# Altium PCB raman_bahremand.PcbDoc
Units mm, origin at the board's own origin, x right, y up, seen from the top; angles counter-clockwise.
Board outline 104.14 x 65.91 mm, 2 copper layers (Top Layer, Bottom Layer); 28 components, 23 nets, 114 pads, 6 vias.
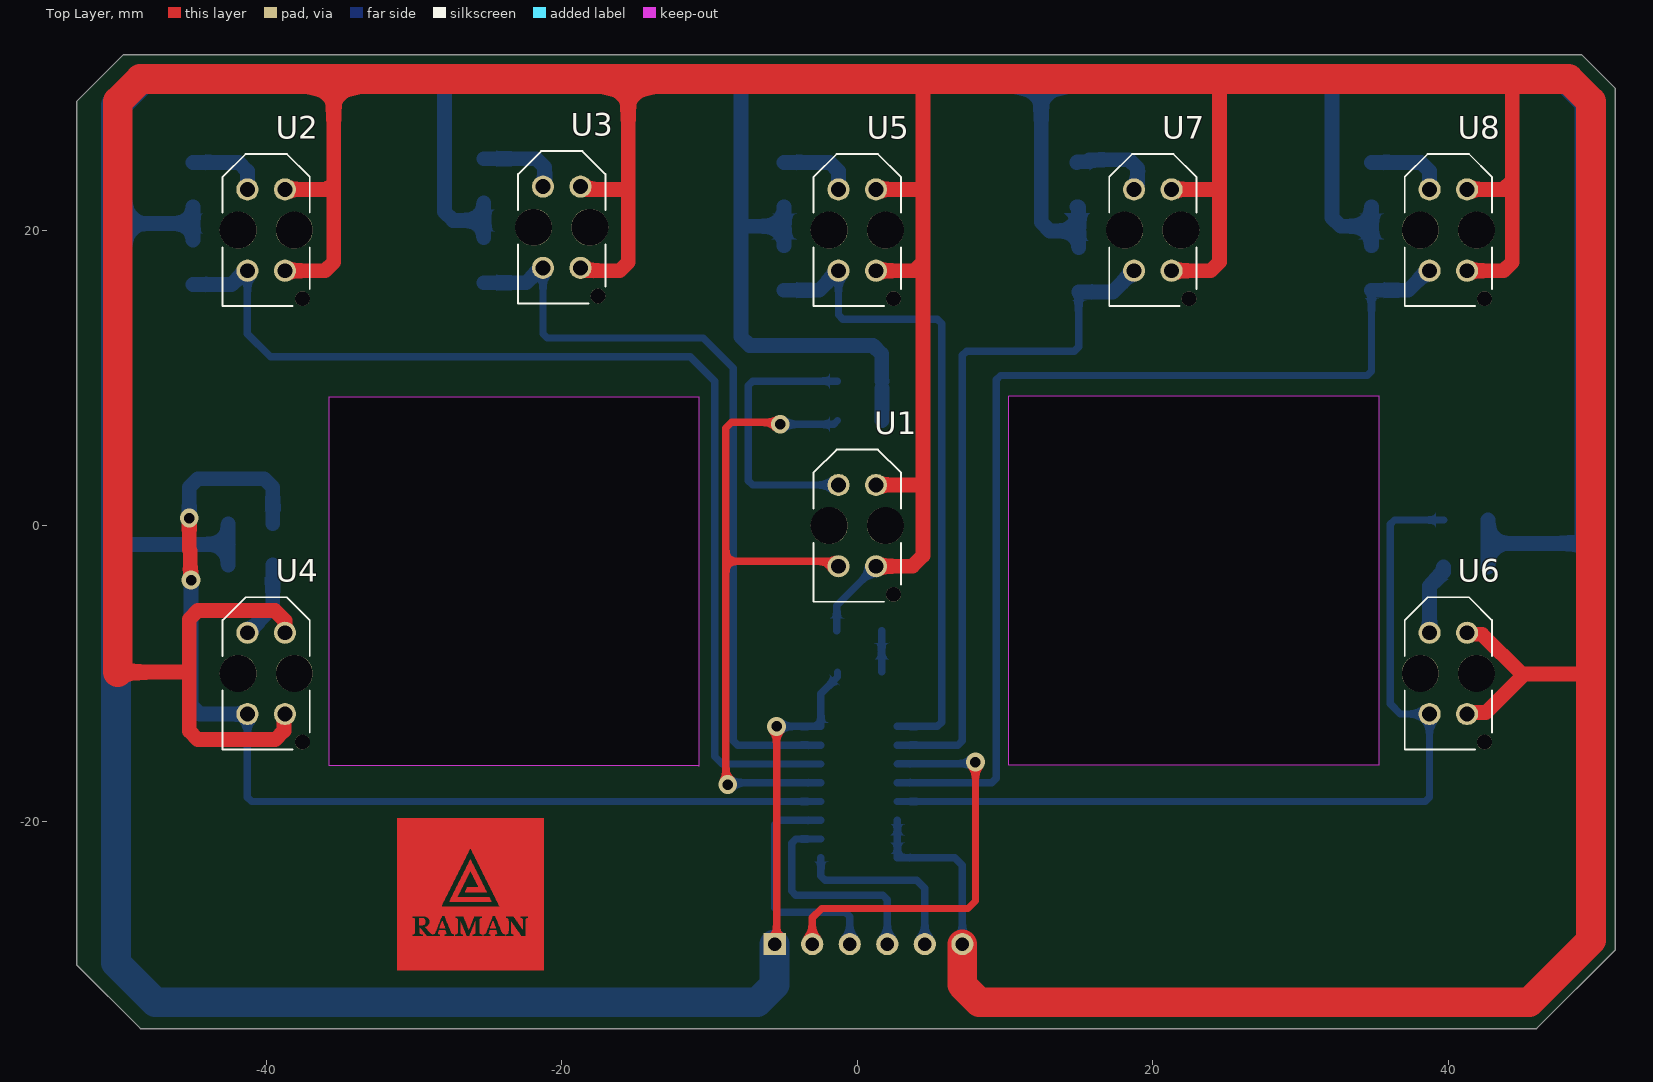
[diagram p0: Top Layer view]
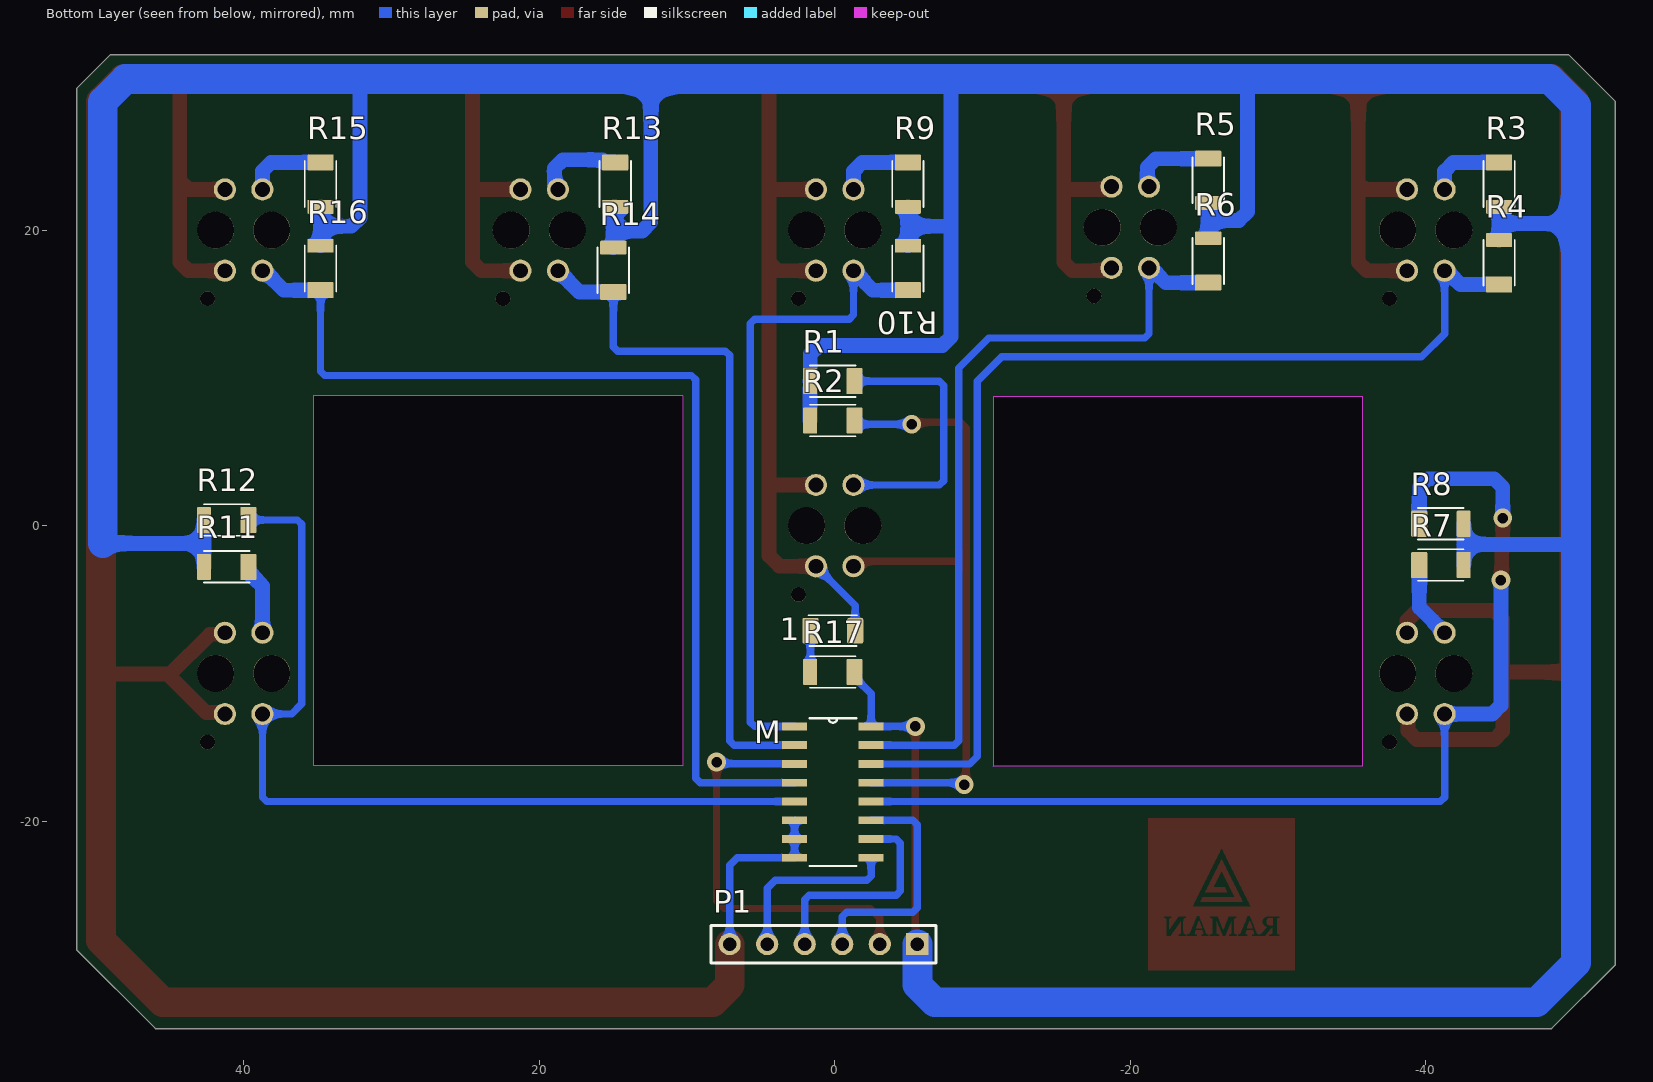
[diagram p1: Bottom Layer view, seen from below]
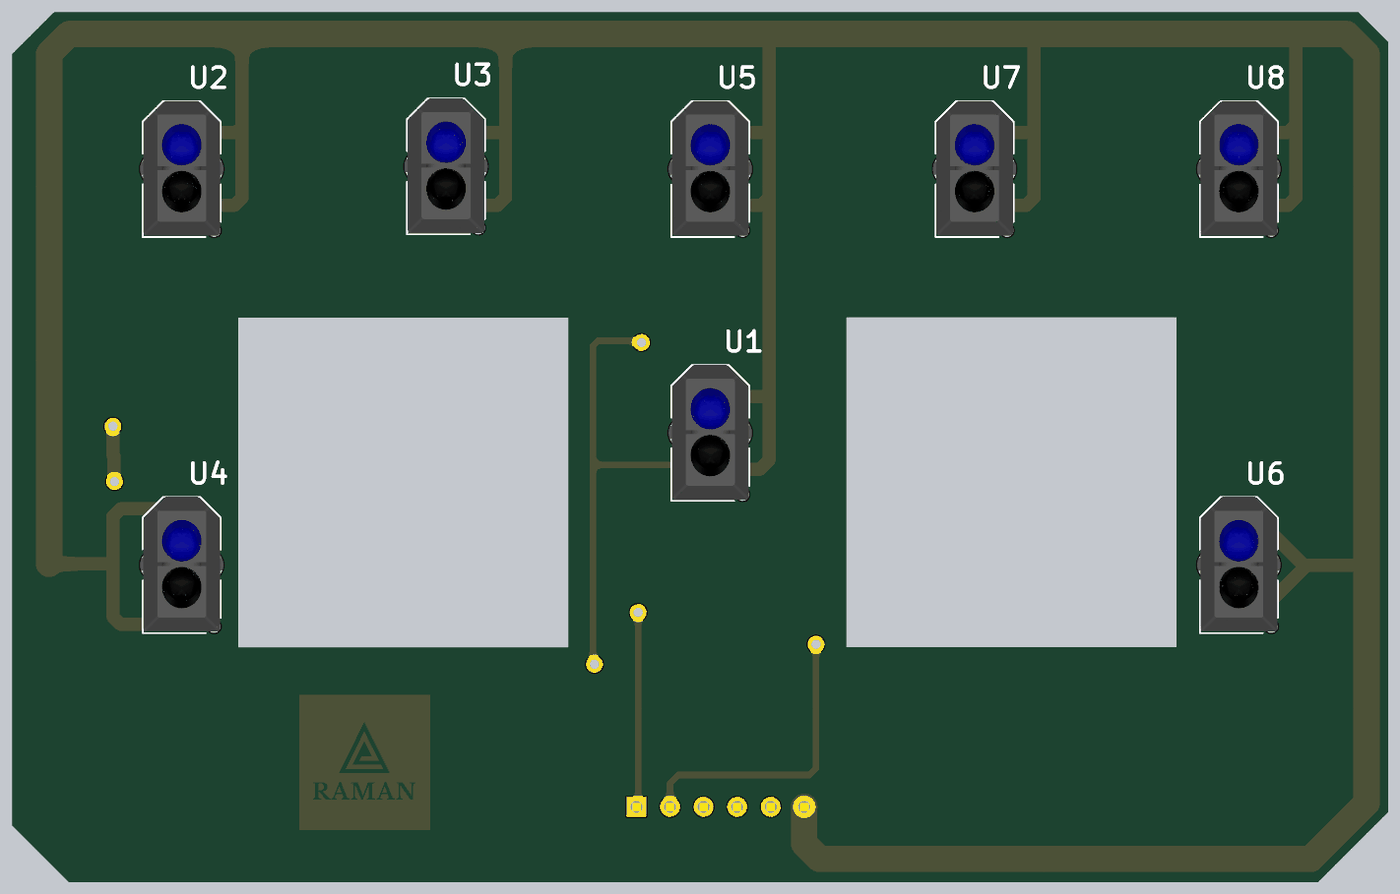
[diagram p2: 3D render of the assembled board from above, using the file's embedded part models]
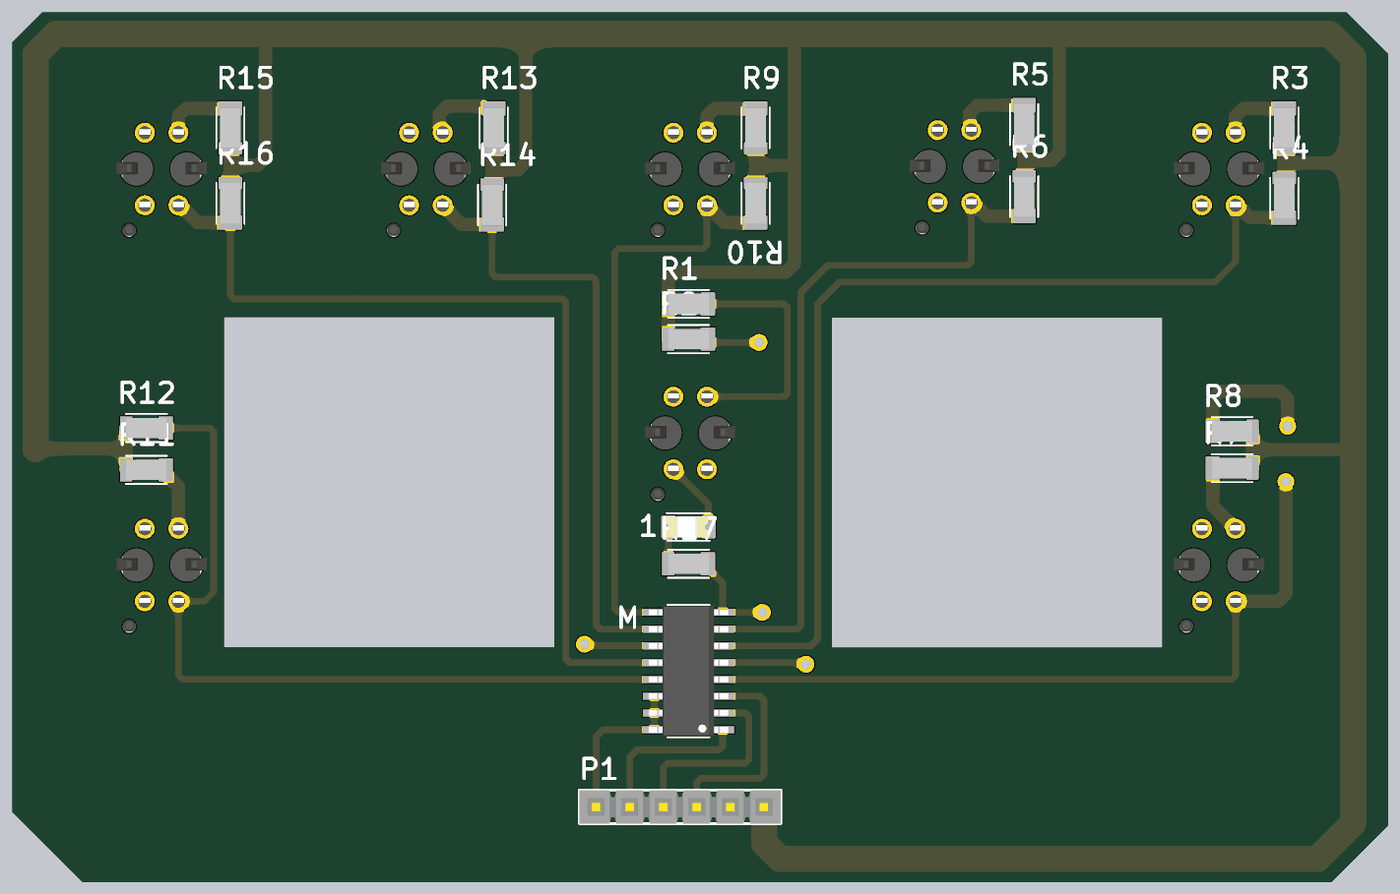
[diagram p3: 3D render of the assembled board from below, using the file's embedded part models]

## Layer stack, top to bottom
Top Solder: solder mask 0.0102, Solder Resist, Dk 3.5
Top Layer: signal copper 0.0356
Dielectric 1: dielectric 0.32, FR-4, Dk 4.8
Bottom Layer: signal copper 0.0356
Bottom Solder: solder mask 0.0102, Solder Resist, Dk 3.5

## Board outline
-52.832,-29.718 -52.832,28.702 -49.657,31.877 49.022,31.877 51.308,29.591 51.308,-28.702 45.974,-34.036 -48.514,-34.036
cut-out: 10.277,8.778 35.277,8.778 35.277,-16.222 35.268,-16.213 10.268,-16.213 10.268,8.768
cut-out: -35.732,8.725 -10.731,8.725 -10.731,-16.275 -10.75,-16.256 -35.732,-16.256

## Design rules (kind name [scope] priority, off if disabled: settings)
Clearance [All] p1: gap=0.254 ignorepadtopadclearanceinfootprint=FALSE except(0: Arc-Hole Track-Hole SMDPad-Hole THPad-Hole Via-Hole Fill-Hole Poly-Hole Region-Hole Text-Hole)
PolygonConnect [All] p1: connectstyle=Relief reliefconductorwidth=0.254 reliefentries=4 polygonreliefangle="90 Angle" airgapwidth=0.254
RoutingVias [All] p1: holewidth=0.711 width=1.27 viastyle="Through Hole" minholewidth=0.711 minwidth=1.27 maxholewidth=0.711 maxwidth=1.27
SolderMaskExpansion [All] p1: expansion=0.102 istentingtop=FALSE
Width [All] p1: maxlimit=2 minlimit=0.5 preferedwidth=1
30 further rules are at their usual default settings.

## Classes and differential pairs
component class Sheet1: 1 M P1 R1 R2 R3 R5 R6 R7 R8 R9 R10 R11 R12 R13 R14 R15 R16 R17 U1 U2 U3 U4 U5 U6 U7

## Components (designator, comment, footprint, x,y, rotation, side; value= is the part's Value field where it differs from the comment)
1 "LTST-C230KFKT" LEDC3216X110 0.127,-7.112 r0 bottom
M "74HC4051D" SOIC127P600X175-16N 0.127,-18.034 r180 bottom
P1 "Header 6" HDR1X6 -5.588,-28.321 r0 bottom
R1 "220" RESC3115X65N 0.127,9.779 r0 bottom
R2 "2K" RESC3115X65N 0.127,7.112 r0 bottom
R3 "220" RESC3115X65N -44.958,23.114 r270 bottom
R4 "2K" RESC3115X65N -44.958,17.78 r90 bottom
R5 "220" RESC3115X65N -25.273,23.368 r270 bottom
R6 "2K" RESC3115X65N -25.273,17.907 r90 bottom
R7 "220" RESC3115X65N -41.021,-2.667 r180 bottom
R8 "2K" RESC3115X65N -41.021,0.127 r180 bottom
R9 "220" RESC3115X65N -4.953,23.114 r270 bottom
R10 "2K" RESC3115X65N -4.953,17.399 r90 bottom
R11 "220" RESC3115X65N 41.148,-2.794 r0 bottom
R12 "2K" RESC3115X65N 41.148,0.381 r0 bottom
R13 "220" RESC3115X65N 14.859,23.114 r270 bottom
R14 "2K" RESC3115X65N 14.986,17.272 r90 bottom
R15 "220" RESC3115X65N 34.798,23.114 r270 bottom
R16 "2K" RESC3115X65N 34.798,17.399 r90 bottom
R17 "1879462-3" RESC3115X65N 0.127,-9.906 r0 bottom
U1 "IR_SENSOR" OPTO_TCRT5000 0,0 r90 top
U2 "IR_SENSOR" OPTO_TCRT5000 -40,20 r90 top
U3 "IR_SENSOR" OPTO_TCRT5000 -20,20.193 r90 top
U4 "IR_SENSOR" OPTO_TCRT5000 -40,-10 r90 top
U5 "IR_SENSOR" OPTO_TCRT5000 0,20 r90 top
U6 "IR_SENSOR" OPTO_TCRT5000 40,-10 r90 top
U7 "IR_SENSOR" OPTO_TCRT5000 20,20 r90 top
U8 "IR_SENSOR" OPTO_TCRT5000 40,20 r90 top

## Footprints (in the part's own frame and the unit in brackets; to place one, negate y for a bottom-side part, rotate by r counter-clockwise, add the part's x,y. Pads: shape width x height; smd on the part's side, far side on the other; paste and mask are expansions set on the pad)
HDR1X6 [mm] "Connector; Header; 6 Position"
  rect 1.5x1.5 hole 0.9: 1(0,0)
  round 1.5 hole 0.9: 2(2.54,0) 3(5.08,0) 4(7.62,0) 5(10.16,0) 6(12.7,0)
  silkscreen extent -1.27,-1.27 13.97,1.27, body extent -1.26,-1.25 13.98,1.29, height 8.38
LEDC3216X110 [mm]
  rrect20% 1.1x1.73 smd: A(1.51,0) C(-1.51,0)
  silkscreen extent -1.65,-1.04 1.65,1.04, body extent -1.47,-0.8 1.73,0.8, height 1.13
OPTO_TCRT5000 [mm]
  round 1.5 hole 1: A(2.75,1.27) CATH(2.75,-1.27) COLL(-2.75,1.27) E(-2.75,-1.27)
  round 1 hole 1 unplated: ""(-4.65,-2.45)
  round 2.5 hole 2.5 unplated: ""(0,1.9) ""(0,-1.9)
  silkscreen extent -5.15,-2.95 5.15,2.95, body extent -5.04,-3.4 5.16,3.4, height 7.2
RESC3115X65N [mm]
  rrect14% 1.09x1.77 smd: 1(-1.465,0)
  rrect14% 0.94x1.77 smd: 2(1.54,0)
  silkscreen extent -1.55,-1.06 1.55,1.06, body extent -1.55,-0.77 1.55,0.77, height 0.53
SOIC127P600X175-16N [mil]
  rect 67x21 smd: 1(-102,175) 2(-102,125) 3(-102,75) 4(-102,25) 5(-102,-25) 6(-102,-75) 7(-102,-125) 8(-102,-175) 9(102,-175) 10(102,-125) 11(102,-75) 12(102,-25) 13(102,25) 14(102,75) 15(102,125) 16(102,175)
  silkscreen extent -62,-197 62,197, body extent -118,-195 118,195, height 67

## Part data
1: "Orange 605nm LED Indication - Discrete 2V 1206 (3216 Metric)", Package="1206 Lite-On", Availability=Unavailable, MF="Lite-On Inc.", MP=LTST-C230KFKT, Price=None, SnapEDA_Link=https://www.snapeda.com/parts/LTST-C230KFKT/Lite-On%20Inc./view-part/353318/?ref=snap
M: "1 Circuit IC Switch 8:1 130Ohm 16-SOIC", Package="SOIC-16 Toshiba", Availability="In Stock", Check_prices=https://www.snapeda.com/parts/74HC4051D/Toshiba/view-part/?ref=eda, MF=Toshiba, MP=74HC4051D, Price=None, Purchase-URL=https://pricing.snapeda.com/search/part/74HC4051D/?ref=eda, SnapEDA_Link=https://www.snapeda.com/parts/74HC4051D/Toshiba/view-part/?ref=snap
P1: "Header, 6-Pin", LatestRevisionDate=17-Jul-2002, LatestRevisionNote="Re-released for DXP Platform.", Publisher="Altium Limited"
R1 R2 R3 R4 R5 R6 R7 R8 R9 R10 R11 R12 R13 R14 R15 R16: library part 1879462-3, "RL73H 2B R12 1% 5K RL", Package=None, Availability=Unavailable, MP=1879462-3, Price=None
R17: "RL73H 2B R12 1% 5K RL", Package=None, Availability=Unavailable, MP=1879462-3, Price=None
U1 U2 U3 U4 U5 U6 U7 U8: library part TCRT5000, "950 nm 60 mA Through Hole Reflective Optical Sensor with Transistor Output", Package=None, Availability=Unavailable, MP=TCRT5000, Price=None

## Via types
v1: diameter 1.27, hole 0.711, Top Layer to Bottom Layer, 6 vias

## Nets (pads, with @x,y where several pads share a name; then routed paths per layer and width w, separated by ;. In a path a pad name is that pad's centre, name@x,y a point inside that pad or via, vN(x,y) a via of type N, cw(c..) or ccw(c..) an arc to the next point about the centre after c; other vN are vias at no path point)
+5: M.16 P1.1 R1.2 R2.2 R3.2 R4.2 R5.2 R6.2 R7.2 R8.2 R9.2 R10.2 R11.2 R12.2 R13.2 R14.2 R15.2 R16.2 R17.1 | length 369.8
  Top Layer w0.5: P1.1 -5.461,-28.194 v1(-5.461,-13.589)
  Bottom Layer w0.5: v1(-5.461,-13.589) M.16 -2.464,-11.372 -1.338,-10.246 R17.1
  Bottom Layer w1: -50.165,-1.524 -49.911,-1.27 -42.561,-1.27 ; -50.165,20.447 -44.958,20.447 ; R4.2 -44.958,20.447 ; R3.2 -44.958,20.447 ; R7.2 -42.561,-1.27 ; R8.2 -42.561,-1.27 ; -28.194,30.226 -27.94,29.972 -27.94,21.238 -27.354,20.653 -25.273,20.653 ; R6.2@-25.273,19.477 -25.273,20.653 ; R5.2 -25.273,20.653 ; -8.128,30.226 -7.874,29.972 -7.874,20.193 ; R10.2 -4.953,20.256 ; R9.2 -4.953,20.256 ; R2.2 R1.2@1.667,9.297 ; R1.2 1.651,9.795 1.651,11.606 1.065,12.192 -7.288,12.192 -7.874,12.778 -7.874,20.193 ; 12.446,30.226 12.446,20.525 13.032,19.939 14.986,19.939 ; R13.2 14.956,21.574 14.986,21.544 14.986,19.939 ; R14.2 14.986,19.939 ; 32.131,30.226 32.004,30.099 32.131,29.972 32.131,20.842 32.717,20.256 34.798,20.256 ; R16.2 34.798,20.256 ; R15.2 34.798,20.256 ; R11.2 42.688,-1.206 ; R12.2 42.688,-1.206 ; 49.53,-1.206 42.688,-1.206 ; -7.874,20.193 -7.81,20.256 -4.953,20.256
  Bottom Layer w2: P1.1 -5.602,-28.335 -5.602,-31.086 -6.774,-32.258 -47.498,-32.258 -50.165,-29.591 -50.165,-1.524 -50.165,20.447 -50.165,28.448 -48.387,30.226 -28.194,30.226 -8.128,30.226 12.446,30.226 32.131,30.226 48.006,30.226 49.53,28.702 49.53,-1.206
A1: M.3 P1.2 | length 28
  Top Layer w0.5: P1.2 -3.048,-26.543 -2.413,-25.908 7.493,-25.908 8.001,-25.4 v1(8.001,-16.002)
  Bottom Layer w0.5: M.3 2.735,-16.112 7.891,-16.112 v1(8.001,-16.002)
D1: M.11 P1.3 | length 16.1
  Bottom Layer w0.5: M.11 -5.295,-19.939 -5.588,-20.232 -5.588,-25.869 -5.295,-26.162 -0.801,-26.162 -0.508,-26.455 P1.3
D2: M.10 P1.4 | length 15.1
  Bottom Layer w0.5: M.10 -4.152,-21.209 -4.445,-21.502 -4.445,-24.726 -4.152,-25.019 1.739,-25.019 2.032,-25.312 P1.4
D3: M.9 P1.5 | length 12.4
  Bottom Layer w0.5: M.9 -2.464,-23.71 -2.171,-24.003 4.025,-24.003 4.572,-24.55 P1.5
GND: 1.C M.6 M.7 M.8 P1.6 U1.CATH U1.E U2.CATH U2.E U3.CATH U3.E U4.CATH U4.E U5.CATH U5.E U6.CATH U6.E U7.CATH U7.E U8.CATH U8.E | length 425.4
  Top Layer w1: -50.038,-9.906 -45.798,-9.906 ; U4.E -38.804,-12.824 -38.804,-13.892 -39.39,-14.478 -44.626,-14.478 -45.212,-13.892 -45.212,-6.332 -44.626,-5.746 -39.412,-5.746 -38.73,-6.428 U4.CATH ; U2.E -36.019,17.25 -35.433,17.836 -35.433,30.226 ; U2.CATH -35.924,22.75 -35.814,22.86 ; U3.E@-18.73,17.25 -16.08,17.25 -15.494,17.836 -15.494,22.733 ; U3.CATH@-18.73,22.75 -15.511,22.75 -15.494,22.733 ; -15.494,30.226 -15.494,22.733 ; U1.E 3.732,-2.75 4.445,-2.037 4.445,17.836 ; U1.CATH 4.147,2.75 ; U5.E 3.859,17.25 4.445,17.836 ; U5.CATH 4.335,22.75 4.445,22.86 ; 4.572,30.226 4.445,30.099 4.445,22.86 ; U7.E 23.925,17.25 24.511,17.836 24.511,22.733 ; U7.CATH 24.494,22.75 24.511,22.733 ; 24.384,30.226 24.511,30.099 24.511,22.733 ; U6.E 41.366,-12.654 42.528,-12.654 44.958,-10.224 ; U6.CATH 41.366,-7.346 42.271,-7.346 44.958,-10.033 49.657,-10.033 ; U8.E 43.737,17.25 44.323,17.836 44.323,23.336 ; U8.CATH 43.737,22.75 44.323,23.336 ; 44.069,30.226 44.323,29.972 44.323,23.336 ; 4.445,17.836 4.445,22.86
  Top Layer w2: -50.038,-9.906 -50.038,28.702 -48.514,30.226 -35.433,30.226 -15.494,30.226 4.572,30.226 24.384,30.226 44.069,30.226 48.133,30.226 49.657,28.702 49.657,-10.033 49.657,-28.067 45.466,-32.258 8.27,-32.258 7.098,-31.086 7.098,-28.335 P1.6
  Bottom Layer w0.5: 1.C -1.383,-5.403 U1.E ; M.6 M.7 M.8 6.604,-22.479 7.112,-22.987 P1.6
Net1_A: 1.A R17.2 | length 2.8
  Bottom Layer w0.5: 1.A 1.652,-7.127 1.652,-9.891 R17.2
NetR1_1: R1.1 U1.A | length 18.8
  Bottom Layer w0.5: R1.1 -7.073,9.779 -7.366,9.486 -7.366,3.043 -7.073,2.75 U1.A
NetR3_1: R3.1 U2.A | length 5.2
  Bottom Layer w1: R3.1 -41.856,24.579 -41.27,23.993 U2.A
NetR5_1: R5.1 U3.A | length 5.7
  Bottom Layer w1: R5.1 -21.734,24.833 -21.148,24.247 -21.148,23.201 -21.27,23.078 U3.A
NetR7_1: R7.1 U4.A | length 5.3
  Bottom Layer w1: U4.A -39.556,-5.536 R7.1
NetR9_1: R9.1 U5.A | length 5.2
  Bottom Layer w1: R9.1 -1.856,24.579 -1.27,23.993 U5.A
NetR11_1: R11.1 U6.A | length 4.9
  Bottom Layer w1: U6.A 38.73,-4.087 39.683,-3.134 R11.1
NetR13_1: R13.1 U7.A | length 6
  Bottom Layer w1: R13.1 14.904,24.624 15.582,24.624 15.723,24.765 18.391,24.765 18.977,24.179 18.977,23.133 18.73,22.885 U7.A
NetR15_1: R15.1 U8.A | length 5.4
  Bottom Layer w1: R15.1 38.144,24.579 38.73,23.993 U8.A
S1: M.13 R2.1 U1.COLL | length 46.2
  Top Layer w0.5: v1(-8.763,-17.522) -8.89,-17.395 -8.89,-2.413 ; v1(-5.207,6.858) -5.334,6.985 -8.509,6.985 -8.89,6.604 -8.89,-2.413 ; U1.COLL -1.541,-2.75 -1.878,-2.413 -8.89,-2.413
  Bottom Layer w0.5: v1(-8.763,-17.522) -8.64,-17.399 M.13 ; v1(-5.207,6.858) -1.592,6.858 R2.1
S2: M.14 R4.1 U2.COLL | length 74.1
  Bottom Layer w0.5: U2.COLL -41.27,12.988 -39.712,11.43 -11.303,11.43 -9.652,9.779 -9.652,-15.621 -9.144,-16.129 M.14
  Bottom Layer w1: R4.1 -42.34,16.315 -41.405,17.25 U2.COLL
S3: M.15 R6.1 U3.COLL | length 54
  Bottom Layer w0.5: U3.COLL -21.27,12.993 -20.977,12.7 -10.414,12.7 -8.382,10.668 -8.382,-14.566 -8.089,-14.859 M.15
  Bottom Layer w1: R6.1 -22.406,16.442 -21.405,17.443 U3.COLL
S4: M.12 R8.1 U4.COLL | length 72
  Top Layer w1: v1(-45.212,0.508) -45.212,-1.627 -45.137,-1.702 -45.137,-3.631 v1(-45.085,-3.683)
  Bottom Layer w0.5: U4.COLL -41.27,-18.376 -40.977,-18.669 M.12
  Bottom Layer w1: v1(-45.212,0.508) -45.212,2.589 -44.626,3.175 -40.142,3.175 -39.556,2.589 R8.1 ; v1(-45.085,-3.683) -45.085,-12.164 -44.499,-12.75 U4.COLL
S5: M.1 R10.1 U5.COLL | length 44.5
  Bottom Layer w0.5: U5.COLL -1.27,14.263 -0.977,13.97 5.422,13.97 5.715,13.677 5.715,-13.296 5.422,-13.589 M.1
  Bottom Layer w1: R10.1 -2.586,15.934 U5.COLL
S6: M.5 R12.1 U6.COLL | length 60.6
  Bottom Layer w0.5: M.5 38.437,-18.669 38.73,-18.376 U6.COLL 36.753,-12.75 36.068,-12.065 36.068,0.088 36.361,0.381 R12.1
S7: M.2 R14.1 U7.COLL | length 46.8
  Bottom Layer w0.5: M.2 6.819,-14.859 7.112,-14.566 7.112,11.518 7.405,11.811 14.693,11.811 14.986,12.104 R14.1
  Bottom Layer w1: R14.1 17.287,15.807 U7.COLL
S8: M.4 R16.1 U8.COLL | length 69.4
  Bottom Layer w0.5: M.4 9.105,-17.399 9.398,-17.106 9.398,9.867 9.691,10.16 34.505,10.16 34.798,10.453 R16.1
  Bottom Layer w1: R16.1 37.279,15.934 38.595,17.25 U8.COLL
pads on no net: U1. U2. U3. U4. U5. U6. U7. U8.

## Other copper
Top Layer:
  region: -28.044,-26.878 -28.025,-26.878 -28.025,-26.934 -28.006,-26.934 -28.006,-26.972 -27.988,-26.972 -27.988,-27.028 -27.969,-27.028 -27.969,-27.084 -27.95,-27.084 -27.95,-27.122 -27.932,-27.122 -27.932,-27.178 -27.913,-27.178 -27.913,-27.234 -27.894,-27.234 -27.894,-27.253 -28.287,-27.253 -28.287,-27.234 -28.269,-27.234 -28.269,-27.196 -28.25,-27.196 -28.25,-27.14 -28.231,-27.14 -28.231,-27.103 -28.212,-27.103 -28.212,-27.047 -28.194,-27.047 -28.194,-26.99 -28.175,-26.99 -28.175,-26.953 -28.156,-26.953 -28.156,-26.897 -28.138,-26.897 -28.138,-26.859 -28.119,-26.859 -28.119,-26.803 -28.1,-26.803 -28.1,-26.766 -28.081,-26.766 -28.081,-26.785 -28.063,-26.785 -28.063,-26.822 -28.044,-26.822 -28.044,-26.859
  region: -29.261,-26.653 -29.261,-26.71 -29.242,-26.71 -29.242,-26.897 -29.261,-26.897 -29.261,-26.934 -29.28,-26.934 -29.28,-26.972 -29.299,-26.972 -29.299,-26.99 -29.317,-26.99 -29.317,-27.009 -29.355,-27.009 -29.355,-27.028 -29.392,-27.028 -29.392,-27.047 -29.654,-27.047 -29.654,-26.56 -29.373,-26.56 -29.373,-26.579 -29.336,-26.579 -29.336,-26.597 -29.317,-26.597 -29.317,-26.616 -29.299,-26.616 -29.299,-26.635 -29.28,-26.635 -29.28,-26.653
  region: -24.729,-27.253 -24.842,-27.253 -24.842,-27.215 -24.823,-27.215 -24.823,-27.159 -24.804,-27.159 -24.804,-27.122 -24.786,-27.122 -24.786,-27.065 -24.767,-27.065 -24.767,-27.009 -24.748,-27.009 -24.748,-26.972 -24.729,-26.972 -24.729,-26.916 -24.711,-26.916 -24.711,-26.878 -24.692,-26.878 -24.692,-26.822 -24.673,-26.822 -24.673,-26.785 -24.655,-26.785 -24.655,-26.766 -24.636,-26.766 -24.636,-26.803 -24.617,-26.803 -24.617,-26.859 -24.598,-26.859 -24.598,-26.916 -24.58,-26.916 -24.58,-26.953 -24.561,-26.953 -24.561,-27.009 -24.542,-27.009 -24.542,-27.065 -24.523,-27.065 -24.523,-27.103 -24.505,-27.103 -24.505,-27.159 -24.486,-27.159 -24.486,-27.196 -24.467,-27.196 -24.467,-27.253 -24.711,-27.253
  region: 466 vertices and 0 holes, not listed, extent -27.595,-25.455 -24.767,-22.609
  region: 5 vertices and 5 holes, not listed, extent -31.115,-30.099 -21.209,-19.818

## Silkscreen, mask and mechanical layers (free items; w line width, h text height)
Top Overlay:
  region: 373.101,293.192 373.304,293.192 373.304,292.989 373.101,292.989 373.101,293.192 372.897,293.192 372.897,293.395 373.101,293.395
  region: 360.705,106.451 360.909,106.451 360.909,106.248 360.705,106.248 360.705,106.451 360.502,106.451 360.502,106.655 360.705,106.655
  region: 371.069,97.714 371.069,97.511 370.865,97.511 370.865,97.714 370.865,97.917 371.069,97.917
  region: 365.176,125.755 365.176,125.552 364.973,125.552 364.973,125.755 364.973,125.959 365.176,125.959
  region: 359.08,112.954 359.283,112.954 359.283,112.751 359.08,112.751 359.08,112.954 358.877,112.954 358.877,113.157 359.08,113.157
  region: 359.689,112.344 359.893,112.344 359.893,112.141 359.689,112.141 359.689,112.344 359.486,112.344 359.486,112.547 359.689,112.547
  region: 373.101,95.682 373.101,95.479 372.897,95.479 372.897,95.682 372.897,95.885 373.101,95.885
  region: 374.117,101.168 374.117,100.965 373.913,100.965 373.913,101.168 373.913,101.371 374.117,101.371
  region: 360.299,107.061 360.502,107.061 360.502,106.858 360.299,106.858 360.299,107.061 360.096,107.061 360.096,107.264 360.299,107.264
  region: 359.283,131.039 359.486,131.039 359.486,130.835 359.283,130.835 359.283,131.039 359.08,131.039 359.08,131.242 359.283,131.242